# EAGLE board Trefferzonenmodul (EAGLE 7.2.0)
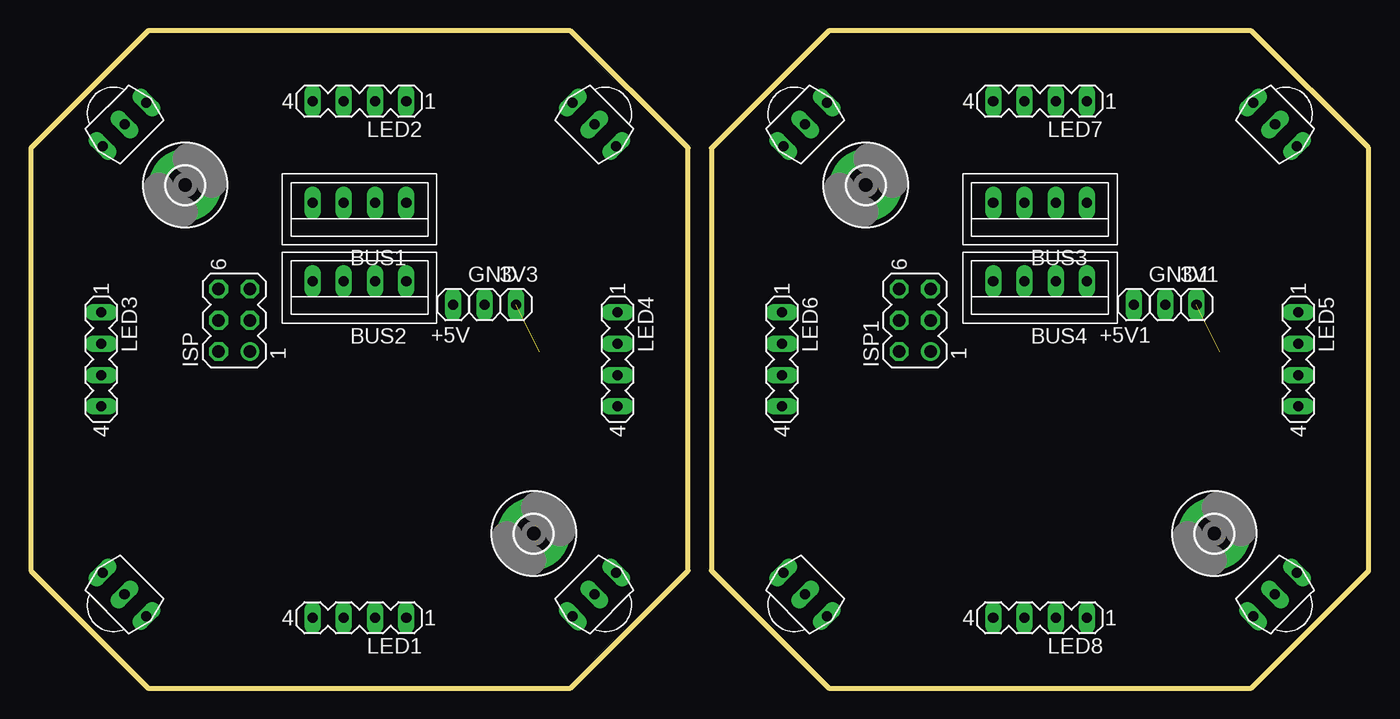
[diagram p0: board, top side]
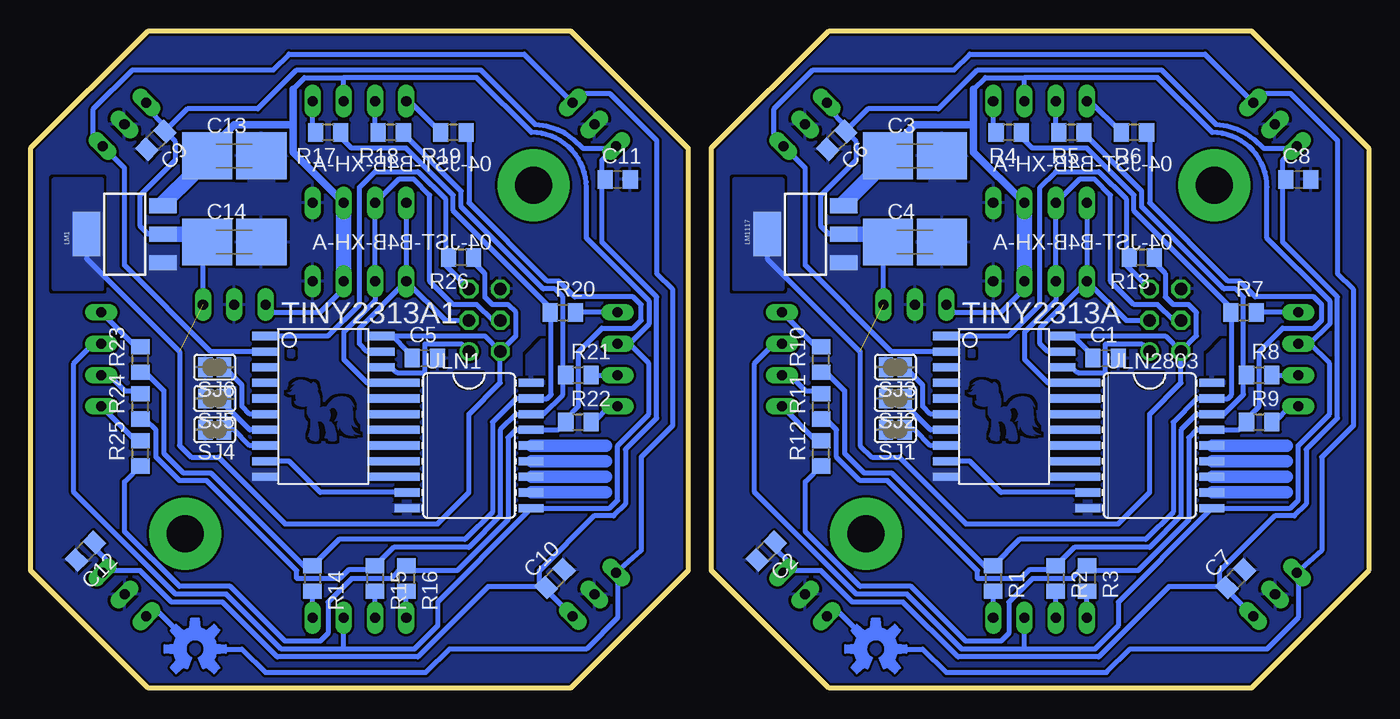
[diagram p1: board, bottom side, seen from below]

Size 108.58 x 53.33 mm. Coordinates in mm from the lower left corner, seen from the top.
Outline: 0,9.53 9.53,0 43.8,0 53.33,9.51 53.34,9.53 53.34,43.81 53.33,43.83 43.8,53.33 9.53,53.33 0,43.81 0,9.53
Outline: 55.24,9.53 64.77,0 99.05,0 108.57,9.51 108.58,9.53 108.58,43.81 108.57,43.83 99.05,53.33 64.77,53.33 55.24,43.81 55.24,9.53
Copper layers (1*16): Top 0.035mm / dielectric 1.5mm / Bottom 0.035mm
Design rules "cnc *": minimum track width 10mil, minimum drill 0.1mm, track to track 8mil, track to pad 8mil, pad to pad 8mil, via to via 8mil, smd to smd 8mil, copper to edge 8mil, drill to drill 8mil, minimum pad ring 10mil, minimum via ring 8mil, stop-mask expansion 4mil, vias tented up to drill 0mil, thermal gap 10mil
Net classes: 0 default: width 0.016 mm

## Footprints (pad centres in the part's own frame; a part is rotated, then mirrored left to right if it is on the bottom)
1X01 = drill 0.813 long: 1 0,0
B4B-XH = drill 0.813 long: P$1 -3.81,0; P$2 -1.27,0; P$3 1.27,0; P$4 3.81,0
C0805 = smd 1.224 x 1.5: 1 -1.026,0; 2 1.026,0
C1808 = smd 4.064 x 3.81: 1 -2.204,0; 2 2.204,0
3,0-PAD = drill 3 pad 5.842: B3,0 0,0
MA03-2 = drill 1.016: 1 -2.54,-1.27 | drill 1.016 octagon: 2 -2.54,1.27; 3 0,-1.27; 4 0,1.27; 5 2.54,-1.27; 6 2.54,1.27
MA04-1 = drill 0.813 long: 1 -3.81,0; 2 -1.27,0; 3 1.27,0; 4 3.81,0
SOT223 = smd 1.219 x 2.235: 1 -2.311,-3.099; 2 0,-3.099; 3 2.311,-3.099 | smd 3.6 x 2.2: 4 0,3.099
R0805 = smd 1.224 x 1.5: 1 -1.026,0; 2 1.026,0
SJ = smd 1.168 x 1.6: 1 -0.762,0; 2 0.762,0
SO20L = smd 0.66 x 2.032: 1 -5.08,-5.131; 2 -3.81,-5.131; 3 -2.54,-5.131; 4 -1.27,-5.131; 5 0,-5.131; 6 1.27,-5.131; 7 2.54,-5.131; 8 3.81,-5.131; 9 5.08,-5.131; 10 6.35,-5.131; 11 6.35,4.394; 12 5.08,4.394; 13 3.81,4.394; 14 2.54,4.394; 15 1.27,4.394; 16 0,4.394; 17 -1.27,4.394; 18 -2.54,4.394; 19 -3.81,4.394; 20 -5.08,4.394
TSOP18XX = drill 0.813 long: GND -0.001,-0.027; OUT -2.501,-0.027; VCC 2.499,-0.027
SO18W = smd 0.66 x 2.032: 1 -5.08,-5.029; 2 -3.81,-5.029; 3 -2.54,-5.029; 4 -1.27,-5.029; 5 0,-5.029; 6 1.27,-5.029; 7 2.54,-5.029; 8 3.81,-5.029; 9 5.08,-5.029; 10 5.08,5.029; 11 3.81,5.029; 12 2.54,5.029; 13 1.27,5.029; 14 0,5.029; 15 -1.27,5.029; 16 -2.54,5.029; 17 -3.81,5.029; 18 -5.08,5.029

## Placement (x,y rotation side)
3V1  [1X01]  94.61,31.11 0 top
3V3  [1X01]  39.37,31.11 0 top
+5V  [1X01]  34.29,31.11 180 top
+5V1  [1X01]  89.53,31.11 180 top
BUS1  04-JST-B4B-XH-A  [B4B-XH]  26.67,39.37 180 top
BUS2  04-JST-B4B-XH-A  [B4B-XH]  26.67,33.02 180 top
BUS3  04-JST-B4B-XH-A  [B4B-XH]  81.92,39.37 180 top
BUS4  04-JST-B4B-XH-A  [B4B-XH]  81.92,33.02 180 top
C1  100n  [C0805]  21.36,26.77 0 bottom
C2  100n  [C0805]  48.9,11.11 225 bottom
C3  [C1808]  36.83,43.18 0 bottom
C4  [C1808]  36.83,36.2 0 bottom
C5  100n  [C0805]  76.6,26.77 0 bottom
C6  100n  [C0805]  43.18,44.45 225 bottom
C7  100n  [C0805]  10.79,8.89 45 bottom
C8  100n  [C0805]  5.71,41.27 0 bottom
C9  100n  [C0805]  98.42,44.45 225 bottom
C10  100n  [C0805]  66.04,8.89 45 bottom
C11  100n  [C0805]  60.96,41.27 0 bottom
C12  100n  [C0805]  104.14,11.11 225 bottom
C13  [C1808]  92.08,43.18 0 bottom
C14  [C1808]  92.08,36.2 0 bottom
GND  [1X01]  36.83,31.11 0 top
GND1  [1X01]  92.08,31.11 0 top
H1  MOUNT-PAD-ROUND3.0  [3,0-PAD]  12.53,40.81 0 top
H2  MOUNT-PAD-ROUND3.0  [3,0-PAD]  40.81,12.53 0 top
H3  MOUNT-PAD-ROUND3.0  [3,0-PAD]  67.78,40.81 0 top
H4  MOUNT-PAD-ROUND3.0  [3,0-PAD]  96.06,12.53 0 top
ISP  [MA03-2]  16.51,29.84 90 top
ISP1  [MA03-2]  71.75,29.84 90 top
LED1  [MA04-1]  26.67,5.71 180 top
LED2  [MA04-1]  26.67,47.62 180 top
LED3  [MA04-1]  5.71,26.67 270 top
LED4  [MA04-1]  47.62,26.67 270 top
LED5  [MA04-1]  102.87,26.67 270 top
LED6  [MA04-1]  60.96,26.67 270 top
LED7  [MA04-1]  81.92,47.62 180 top
LED8  [MA04-1]  81.92,5.71 180 top
LM1  V_REG_MIC2920  [SOT223]  100.97,36.83 90 bottom
LM1117  V_REG_MIC2920  [SOT223]  45.72,36.83 90 bottom
LOGO1  OSHW-LOGOM  [OSHW-LOGO-M]  95.25,3.17 0 top
LOGO2  OSHW-LOGOM  [OSHW-LOGO-M]  40.01,3.17 0 top
R1  100  [R0805]  30.48,8.89 270 bottom
R2  100  [R0805]  25.4,8.89 270 bottom
R3  100  [R0805]  22.86,8.89 270 bottom
R4  100  [R0805]  29.21,45.09 180 bottom
R5  100  [R0805]  24.13,45.09 180 bottom
R6  100  [R0805]  19.05,45.09 180 bottom
R7  100  [R0805]  10.16,30.48 0 bottom
R8  100  [R0805]  8.89,25.4 0 bottom
R9  100  [R0805]  8.89,21.59 0 bottom
R10  100  [R0805]  44.45,26.67 90 bottom
R11  100  [R0805]  44.45,22.86 90 bottom
R12  100  [R0805]  44.45,19.05 90 bottom
R13  10k  [R0805]  18.41,34.92 180 bottom
R14  100  [R0805]  85.72,8.89 270 bottom
R15  100  [R0805]  80.64,8.89 270 bottom
R16  100  [R0805]  78.11,8.89 270 bottom
R17  100  [R0805]  84.45,45.09 180 bottom
R18  100  [R0805]  79.38,45.09 180 bottom
R19  100  [R0805]  74.3,45.09 180 bottom
R20  100  [R0805]  65.41,30.48 0 bottom
R21  100  [R0805]  64.14,25.4 0 bottom
R22  100  [R0805]  64.14,21.59 0 bottom
R23  100  [R0805]  99.69,26.67 90 bottom
R24  100  [R0805]  99.69,22.86 90 bottom
R25  100  [R0805]  99.69,19.05 90 bottom
R26  10k  [R0805]  73.66,34.92 180 bottom
SJ1  [SJ]  38.42,20.95 180 bottom
SJ2  [SJ]  38.42,23.5 180 bottom
SJ3  [SJ]  38.42,26.04 180 bottom
SJ4  [SJ]  93.66,20.95 180 bottom
SJ5  [SJ]  93.66,23.5 180 bottom
SJ6  [SJ]  93.66,26.04 180 bottom
TINY2313A  AT90S2313S  [SO20L]  29.21,23.5 270 bottom
TINY2313A1  AT90S2313S  [SO20L]  84.45,23.5 270 bottom
U$1  TSOP1838  [TSOP18XX]  45.72,45.72 135 top
U$2  TSOP1838  [TSOP18XX]  7.62,45.72 225 top
U$3  TSOP1838  [TSOP18XX]  7.62,7.62 315 top
U$4  TSOP1838  [TSOP18XX]  45.72,7.62 45 top
U$5  TSOP1838  [TSOP18XX]  100.97,45.72 135 top
U$6  TSOP1838  [TSOP18XX]  62.87,45.72 225 top
U$7  TSOP1838  [TSOP18XX]  62.87,7.62 315 top
U$8  TSOP1838  [TSOP18XX]  100.97,7.62 45 top
ULN1  [SO18W]  73.03,19.68 270 bottom
ULN2803  [SO18W]  17.78,19.68 270 bottom

## Library data of the parts
3V1 3V3 +5V +5V1 BUS1-BUS4 C1-C14 GND GND1 LM1 LM1117 LOGO1 LOGO2 R1-R26 ULN1 ULN2803 = wz
H1-H4 = holes
ISP ISP1 = con-lstb; OC_FARNELL: unknown; OC_NEWARK: unknown
LED1-LED8 TINY2313A TINY2313A1 = wz; OC_FARNELL: unknown; OC_NEWARK: unknown
SJ1-SJ6 = jumper
U$1-U$8 = tsop

## Nets
+3V1: 3V1.1 C5.1 C9.1 C10.1 C11.1 C12.1 C14.1 ISP1.2 LM1.2 LM1.4 R26.1 TINY2313A1.20 U$5.VCC U$6.VCC U$7.VCC U$8.VCC
+3V3: 3V3.1 C1.1 C2.1 C4.1 C6.1 C7.1 C8.1 ISP.2 LM1117.2 LM1117.4 R13.1 TINY2313A.20 U$1.VCC U$2.VCC U$3.VCC U$4.VCC
+5V: +5V.1 BUS1.P$2 BUS2.P$2 C3.1 LED1.2 LED2.2 LED3.2 LED4.2 LM1117.3 ULN2803.10
+5V1: +5V1.1 BUS3.P$2 BUS4.P$2 C13.1 LED5.2 LED6.2 LED7.2 LED8.2 LM1.3 ULN1.10
FREI1: ULN2803.18
FREI2: ULN1.14
FREI3: ULN1.12
FREI4: ULN1.13
FREI5: ULN2803.14
FREI6: ULN2803.13
FREI7: ULN2803.12
FREI8: ULN1.18
GND: BUS1.P$1 BUS2.P$1 C1.2 C2.2 C3.2 C4.2 C6.2 C7.2 C8.2 GND.1 ISP.6 LM1117.1 SJ1.2 SJ2.2 SJ3.2 TINY2313A.10 U$1.GND U$2.GND U$3.GND U$4.GND ULN2803.9
GND1: BUS3.P$1 BUS4.P$1 C5.2 C9.2 C10.2 C11.2 C12.2 C13.2 C14.2 GND1.1 ISP1.6 LM1.1 SJ4.2 SJ5.2 SJ6.2 TINY2313A1.10 U$5.GND U$6.GND U$7.GND U$8.GND ULN1.9
HAPTIK: ULN2803.11
HAPTIK1: ULN1.11
LED_B: R3.1 R6.1 R9.1 R12.1 ULN2803.15
LED_B1: R16.1 R19.1 R22.1 R25.1 ULN1.15
LED_G: R2.1 R5.1 R8.1 R11.1 ULN2803.16
LED_G1: R15.1 R18.1 R21.1 R24.1 ULN1.16
LED_R: R1.1 R4.1 R7.1 R10.1 ULN2803.17
LED_R1: R14.1 R17.1 R20.1 R23.1 ULN1.17
N$1: ISP.1 TINY2313A.18
N$2: SJ1.1 TINY2313A.8
N$3: TINY2313A.16 ULN2803.2
N$4: TINY2313A.15 ULN2803.3
N$5: LED4.1 R10.2
N$6: LED4.3 R11.2
N$7: TINY2313A.14 ULN2803.4
N$8: TINY2313A.13 ULN2803.5
N$9: TINY2313A.12 ULN2803.6
N$10: TINY2313A.11 ULN2803.7
N$11: TINY2313A.9 ULN2803.8
N$12: LED4.4 R12.2
N$13: LED3.1 R7.2
N$14: LED3.3 R8.2
N$15: LED3.4 R9.2
N$16: LED2.1 R4.2
N$17: LED2.3 R5.2
N$18: SJ2.1 TINY2313A.7
N$19: SJ3.1 TINY2313A.6
N$22: LED2.4 R6.2
N$23: ISP.5 R13.2 TINY2313A.1
N$24: LED1.1 R1.2
N$25: LED1.3 R2.2
N$26: LED1.4 R3.2
N$33: ISP1.1 TINY2313A1.18
N$34: TINY2313A1.16 ULN1.2
N$35: TINY2313A1.15 ULN1.3
N$36: TINY2313A1.14 ULN1.4
N$37: TINY2313A1.13 ULN1.5
N$38: TINY2313A1.12 ULN1.6
N$39: TINY2313A1.11 ULN1.7
N$40: TINY2313A1.9 ULN1.8
N$41: SJ4.1 TINY2313A1.8
N$42: SJ5.1 TINY2313A1.7
N$43: SJ6.1 TINY2313A1.6
N$44: ISP1.5 R26.2 TINY2313A1.1
N$45: LED5.1 R23.2
N$46: LED5.3 R24.2
N$47: LED5.4 R25.2
N$48: LED6.1 R20.2
N$49: LED6.3 R21.2
N$50: LED6.4 R22.2
N$51: LED7.1 R17.2
N$52: LED7.3 R18.2
N$53: LED7.4 R19.2
N$54: LED8.1 R14.2
N$55: LED8.3 R15.2
N$56: LED8.4 R16.2
RX: TINY2313A.2 U$1.OUT U$2.OUT U$3.OUT U$4.OUT
RX1: TINY2313A1.2 U$5.OUT U$6.OUT U$7.OUT U$8.OUT
SCL: BUS1.P$4 BUS2.P$4 ISP.3 TINY2313A.19
SCL1: BUS3.P$4 BUS4.P$4 ISP1.3 TINY2313A1.19
SDA: BUS1.P$3 BUS2.P$3 ISP.4 TINY2313A.17 ULN2803.1
SDA1: BUS3.P$3 BUS4.P$3 ISP1.4 TINY2313A1.17 ULN1.1

## Tracks (layer width: path | path; a pad name or v marks a point on that pad's centre or on a via)
+3V1  (1 unrouted)
  Bottom 0.406: LM1.2 99.06,36.83 99.69,37.47 99.69,40.01 96.84,42.86 96.84,44.31 C9.1 | TINY2313A1.20 79.24,28.57 | 79.24,28.57 71.75,28.57 ISP1.2 | LM1.4 104.06,34.85 96.52,27.3 96.52,19.68 95.57,18.73 93.34,18.73 87.95,13.34 75.56,13.34 73.03,15.88 73.03,22.23 70.48,24.77 ISP1.2 | C14.1 93.81,35.09 94.61,34.92 3V1.1 | 67.31,8.26 71.44,8.26 77.15,2.54 88.58,2.54 93.03,6.99 97.16,6.99 99.69,9.53 102.59,9.53 U$8.VCC 102.23,9.88 102.23,10.16 103.41,11.34 C12.1 | 67.31,8.26 66.86,8.26 C10.1 | C10.1 67.22,8.16 67.31,8.26 | 67.31,8.26 67.31,9.53 62.87,13.97 61.28,13.97 60.33,14.92 60.33,19.37 57.78,21.91 57.78,31.75 62.23,36.2 62.23,41.46 | C10.1 66.77,7.99 U$7.VCC | C9.1 97.7,45.63 99.06,46.99 99.06,47.35 U$5.VCC | C9.1 95.89,46.99 90.17,46.99 87,50.16 72.07,50.16 67.63,45.72 66.75,45.6 65.84,45.3 65.25,45 64.55,44.5 63.82,43.81 61.24,43.81 U$6.VCC 62.23,42.82 62.23,41.46 | ISP1.2 69.22,28.57 69.22,30.48 69.85,31.11 71.12,31.11 71.75,31.75 71.75,33.66 72.39,34.29 72.39,34.68 R26.1 | C5.1 77.94,27.28 79.24,28.57 | 62.23,41.46 C11.1
  Bottom 1.27: LM1.2 95.25,36.83 94.28,35.86 C14.1
  pour Bottom (no thermals): 102.87,41.27 102.87,32.38 106.68,32.38 106.68,41.27
+3V3  (1 unrouted)
  Bottom 0.406: LM1117.2 43.81,36.83 44.45,37.47 44.45,40.01 41.59,42.86 41.59,44.31 C6.1 | TINY2313A.20 24,28.57 | 24,28.57 16.51,28.57 ISP.2 | LM1117.4 48.82,34.85 41.27,27.3 41.27,19.68 40.32,18.73 38.1,18.73 32.7,13.34 20.32,13.34 17.78,15.88 17.78,22.23 15.24,24.77 ISP.2 | C4.1 38.57,35.09 39.37,34.92 3V3.1 | 12.06,8.26 16.19,8.26 21.91,2.54 33.34,2.54 37.78,6.99 41.91,6.99 44.45,9.53 47.35,9.53 U$4.VCC 46.99,9.88 46.99,10.16 48.17,11.34 C2.1 | 12.06,8.26 11.61,8.26 C7.1 | C7.1 11.97,8.16 12.06,8.26 | 12.06,8.26 12.06,9.53 7.62,13.97 6.03,13.97 5.08,14.92 5.08,19.37 2.54,21.91 2.54,31.75 6.99,36.2 6.99,41.46 | C7.1 11.52,7.99 U$3.VCC | C6.1 42.45,45.63 43.81,46.99 43.81,47.35 U$1.VCC | C6.1 40.64,46.99 34.92,46.99 31.75,50.16 16.83,50.16 12.38,45.72 11.5,45.6 10.6,45.3 10,45 9.3,44.5 8.57,43.81 5.99,43.81 U$2.VCC 6.99,42.82 6.99,41.46 | ISP.2 13.97,28.57 13.97,30.48 14.61,31.11 15.88,31.11 16.51,31.75 16.51,33.66 17.14,34.29 17.14,34.68 R13.1 | C1.1 22.7,27.28 24,28.57 | 6.99,41.46 C8.1
  Bottom 1.27: LM1117.2 40.01,36.83 39.03,35.86 C4.1
  pour Bottom (no thermals): 47.62,41.27 47.62,32.38 51.44,32.38 51.44,41.27
+5V
  Bottom 0.406: 27.94,3.17 22.23,3.17 20.32,5.08 20.32,6.99 13.34,13.97 ULN2803.10 6.35,14.61 5.71,15.24 5.71,19.68 3.17,22.23 3.17,26.35 4.76,27.94 | 27.94,3.17 LED1.2 | LED2.2 27.94,49.53 | 27.94,49.53 17.14,49.53 12.7,45.09 arc90 8.26,40.64 8.26,36.51 3.17,31.43 3.17,29.53 4.76,27.94 | C3.1 40.13,41.78 37.47,42.55 38.1,44.45 | 32.07,48.58 31.11,49.53 27.94,49.53 | LED4.2 48.26,27.94 49.85,26.35 49.85,15.88 41.59,7.62 37.47,7.62 33.02,3.17 27.94,3.17 | 4.76,27.94 LED3.2 | LM1117.3 42.62,39.29 | +5V.1 33.66,30.48 29.84,30.48 27.94,32.38 BUS2.P$2
  Bottom 0.61: 38.1,44.45 36.83,45.72 32.07,45.72 | 32.07,45.72 32.07,48.58 | 32.07,45.72 32.07,43.5 BUS1.P$2
  Bottom 1.27: 42.62,39.29 40.13,41.78 | BUS2.P$2 BUS1.P$2
+5V1
  Bottom 0.406: 83.19,3.17 77.47,3.17 75.56,5.08 75.56,6.99 68.58,13.97 ULN1.10 61.59,14.61 60.96,15.24 60.96,19.68 58.42,22.23 58.42,26.35 60.01,27.94 | 83.19,3.17 LED8.2 | LED7.2 83.19,49.53 | 83.19,49.53 72.39,49.53 67.94,45.09 arc90 63.5,40.64 63.5,36.51 58.42,31.43 58.42,29.53 60.01,27.94 | C13.1 95.38,41.78 92.71,42.55 93.34,44.45 | 87.31,48.58 86.36,49.53 83.19,49.53 | LED5.2 103.5,27.94 105.09,26.35 105.09,15.88 96.84,7.62 92.71,7.62 88.27,3.17 83.19,3.17 | 60.01,27.94 LED6.2 | LM1.3 97.87,39.29 | +5V1.1 88.9,30.48 85.09,30.48 83.19,32.38 BUS4.P$2
  Bottom 0.61: 93.34,44.45 92.08,45.72 87.31,45.72 | 87.31,45.72 87.31,48.58 | 87.31,45.72 87.31,43.5 BUS3.P$2
  Bottom 1.27: 97.87,39.29 95.38,41.78 | BUS4.P$2 BUS3.P$2
FREI1
  pour Bottom (isolate 0.264): 11.75,24.77 11.75,28.26 13.02,26.99 13.02,24.77
FREI8
  pour Bottom (isolate 0.264): 66.99,24.77 66.99,28.26 68.26,26.99 68.26,24.77
GND
  pour Bottom (rank 6): 0,43.81 9.53,53.34 43.81,53.34 53.34,43.81 53.34,9.53 43.81,0 9.53,0 0,9.53
  pour Bottom (no thermals): 40.64,36.2 45.09,36.2 45.09,32.38 40.64,32.38
  pour Bottom: 20.95,15.24 24.77,15.24 24.77,13.97 20.95,13.97
  pour Bottom (no thermals): 33.02,18.41 36.2,18.41 36.2,16.51 33.02,16.51
  pour Bottom (no thermals): 33.66,41.91 35.56,41.91 35.56,40.64 33.66,40.64
GND1
  pour Bottom (rank 6): 55.24,43.81 64.77,53.34 99.06,53.34 108.58,43.81 108.58,9.53 99.06,0 64.77,0 55.24,9.53
  pour Bottom (no thermals): 95.89,36.2 100.33,36.2 100.33,32.38 95.89,32.38
  pour Bottom: 76.2,15.24 80.01,15.24 80.01,13.97 76.2,13.97
  pour Bottom (no thermals): 88.27,18.41 91.44,18.41 91.44,16.51 88.27,16.51
  pour Bottom (no thermals): 88.9,41.91 90.81,41.91 90.81,40.64 88.9,40.64
LED_B
  Bottom 0.406: R12.1 45.72,16.75 45.72,12.7 41.27,8.26 37.15,8.26 32.7,3.81 29.84,3.81 29.21,4.45 29.21,6.99 27.3,8.89 24.13,8.89 23.1,9.92 R3.1 22.62,9.53 18.73,9.53 14.61,13.65 14.61,20.32 13.97,20.95 ULN2803.15 10.55,20.95 R9.1 9.92,21.83 8.89,22.86 8.89,27.3 6.99,29.21 4.45,29.21 3.81,29.84 3.81,31.11 4.45,31.75 9.21,31.75 10.48,33.02 11.43,33.02 17.78,39.37 17.78,44.84 R6.1
LED_B1
  Bottom 0.406: R25.1 100.97,16.75 100.97,12.7 96.52,8.26 92.39,8.26 87.95,3.81 85.09,3.81 84.45,4.45 84.45,6.99 82.55,8.89 79.38,8.89 78.35,9.92 R16.1 77.86,9.53 73.98,9.53 69.85,13.65 69.85,20.32 69.22,20.95 ULN1.15 65.8,20.95 R22.1 65.16,21.83 64.14,22.86 64.14,27.3 62.23,29.21 59.69,29.21 59.05,29.84 59.05,31.11 59.69,31.75 64.45,31.75 65.72,33.02 66.67,33.02 73.03,39.37 73.03,44.84 R19.1
LED_G
  Bottom 0.406: 10.16,24.77 10.16,23.81 11.75,22.23 ULN2803.16 13.97,22.23 15.24,20.95 15.24,13.97 17.78,11.43 23.89,11.43 R2.1 25.72,9.84 26.11,9.6 27.55,9.6 28.26,8.89 31.75,8.89 31.75,9.53 39.05,16.83 41.27,16.83 43.18,18.73 43.18,20.95 44.06,21.83 R11.1 | 10.16,24.77 10.16,31.75 10.79,32.38 11.75,32.38 18.41,39.05 18.41,40.32 22.54,44.45 23.1,44.69 R5.1 | R8.1 10.16,24.77
LED_G1
  Bottom 0.406: 65.41,24.77 65.41,23.81 66.99,22.23 ULN1.16 69.22,22.23 70.48,20.95 70.48,13.97 73.03,11.43 79.13,11.43 R15.1 80.96,9.84 81.35,9.6 82.79,9.6 83.5,8.89 87,8.89 87,9.53 94.3,16.83 96.52,16.83 98.42,18.73 98.42,20.95 99.3,21.83 R24.1 | 65.41,24.77 65.41,31.75 66.04,32.38 66.99,32.38 73.66,39.05 73.66,40.32 77.79,44.45 78.35,44.69 R18.1 | R21.1 65.41,24.77
LED_R
  Bottom 0.406: 11.19,30.72 11.19,30.87 19.05,38.73 19.05,40.01 22.86,43.81 27.3,43.81 28.18,44.69 R4.1 27.94,45.09 | 30.72,9.53 30.8,9.53 38.73,17.46 40.96,17.46 42.55,19.05 42.55,24.13 44.06,25.64 R10.1 | 30.48,9.53 30.72,9.53 | 30.72,9.53 R1.1 28.33,12.06 18.1,12.06 15.88,14.29 15.88,21.59 13.97,23.5 ULN2803.17 11.43,23.5 11.11,23.81 11.11,30.16 11.19,30.72 | R7.1 11.19,30.72
LED_R1
  Bottom 0.406: 66.43,30.72 66.43,30.87 74.3,38.73 74.3,40.01 78.11,43.81 82.55,43.81 83.43,44.69 R17.1 83.19,45.09 | 85.97,9.53 86.04,9.53 93.98,17.46 96.2,17.46 97.79,19.05 97.79,24.13 99.3,25.64 R23.1 | 85.72,9.53 85.97,9.53 | 85.97,9.53 R14.1 83.58,12.06 73.34,12.06 71.12,14.29 71.12,21.59 69.22,23.5 ULN1.17 66.67,23.5 66.36,23.81 66.36,30.16 66.43,30.72 | R20.1 66.43,30.72
N$1
  Bottom 0.406: TINY2313A.18 24.13,26.04 23.59,25.6 21.36,25.6 21.36,27.94 18.41,27.94 ISP.1
N$2
  Bottom 0.406: TINY2313A.8 35.56,19.68 36.83,20.95 SJ1.1
N$3
  Bottom 0.406: ULN2803.2 TINY2313A.16
N$4
  Bottom 0.406: ULN2803.3 TINY2313A.15
N$5
  Bottom 0.406: R10.2 44.84,27.7 LED4.1
N$6
  Bottom 0.406: LED4.3 46.99,25.4 45.72,24.13 44.69,24.13 R11.2
N$7
  Bottom 0.406: ULN2803.4 TINY2313A.14
N$8
  Bottom 0.406: ULN2803.5 TINY2313A.13
N$9
  Bottom 0.406: ULN2803.6 TINY2313A.12
N$10
  Bottom 0.406: ULN2803.7 TINY2313A.11
N$11
  Bottom 0.406: ULN2803.8 29.84,15.88 32.38,18.41 TINY2313A.9
N$12
  Bottom 0.406: R12.2 44.84,20.08 LED4.4
N$13
  Bottom 0.406: LED3.1 R7.2
N$14
  Bottom 0.406: R8.2 LED3.3
N$15
  Bottom 0.406: R9.2 7.62,21.59 6.35,22.86 LED3.4
N$16
  Bottom 0.406: R4.2 30.24,45.48 30.48,45.72 LED2.1
N$17
  Bottom 0.406: R5.2 25.16,44.84 25.4,45.72 LED2.3
N$18
  Bottom 0.406: TINY2313A.7 35.56,20.95 37.47,22.86 37.47,23.05 SJ2.1 37.34,22.73
N$19
  Bottom 0.406: TINY2313A.6 35.56,22.23 36.2,22.86 36.2,24.57 SJ3.1
N$21
  Bottom 1.016: 12.7,19.68 6.67,19.68
N$22
  Bottom 0.406: R6.2 22.62,47.62 LED2.4
N$23
  Bottom 0.406: TINY2313A.1 29.21,28.57 26.67,31.11 26.67,40.64 25.4,41.91 21.91,41.91 19.68,39.69 19.68,34.92 | 19.68,34.92 19.68,34.29 ISP.5 | R13.2 19.68,34.92
N$24
  Bottom 0.406: LED1.1 R1.2
N$25
  Bottom 0.406: LED1.3 R2.2
N$26
  Bottom 0.406: LED1.4 R3.2
N$27
  Bottom 1.016: 12.7,18.41 6.67,18.41
N$28
  Bottom 1.016: 12.7,17.14 6.67,17.14
N$29
  Bottom 1.016: 12.7,15.88 6.67,15.88
N$30
  pour Bottom: 225 corners
N$31
  pour Bottom: 32.07,27.3 32.38,27.3 32.38,26.99 32.07,26.99
N$32
  pour Bottom: 16.83,25.4 18.73,25.4 arc-90 17.78,24.55 arc-90
N$33
  Bottom 0.406: TINY2313A1.18 79.38,26.04 78.84,25.6 76.6,25.6 76.6,27.94 73.66,27.94 ISP1.1
N$34
  Bottom 0.406: ULN1.2 TINY2313A1.16
N$35
  Bottom 0.406: ULN1.3 TINY2313A1.15
N$36
  Bottom 0.406: ULN1.4 TINY2313A1.14
N$37
  Bottom 0.406: ULN1.5 TINY2313A1.13
N$38
  Bottom 0.406: ULN1.6 TINY2313A1.12
N$39
  Bottom 0.406: ULN1.7 TINY2313A1.11
N$40
  Bottom 0.406: ULN1.8 85.09,15.88 87.63,18.41 TINY2313A1.9
N$41
  Bottom 0.406: TINY2313A1.8 90.81,19.68 92.08,20.95 SJ4.1
N$42
  Bottom 0.406: TINY2313A1.7 90.81,20.95 92.71,22.86 92.71,23.05 SJ5.1 92.58,22.73
N$43
  Bottom 0.406: TINY2313A1.6 90.81,22.23 91.44,22.86 91.44,24.57 SJ6.1
N$44
  Bottom 0.406: TINY2313A1.1 84.45,28.57 81.92,31.11 81.92,40.64 80.64,41.91 77.15,41.91 74.93,39.69 74.93,34.92 | 74.93,34.92 74.93,34.29 ISP1.5 | R26.2 74.93,34.92
N$45
  Bottom 0.406: R23.2 100.09,27.7 LED5.1
N$46
  Bottom 0.406: LED5.3 102.23,25.4 100.97,24.13 99.94,24.13 R24.2
N$47
  Bottom 0.406: R25.2 100.09,20.08 LED5.4
N$48
  Bottom 0.406: LED6.1 R20.2
N$49
  Bottom 0.406: R21.2 LED6.3
N$50
  Bottom 0.406: R22.2 62.87,21.59 61.59,22.86 LED6.4
N$51
  Bottom 0.406: R17.2 85.48,45.48 85.72,45.72 LED7.1
N$52
  Bottom 0.406: R18.2 80.4,44.84 80.64,45.72 LED7.3
N$53
  Bottom 0.406: R19.2 77.86,47.62 LED7.4
N$54
  Bottom 0.406: LED8.1 R14.2
N$55
  Bottom 0.406: LED8.3 R15.2
N$56
  Bottom 0.406: LED8.4 R16.2
N$57
  Bottom 1.016: 67.94,19.68 61.91,19.68
N$58
  Bottom 1.016: 67.94,18.41 61.91,18.41
N$59
  Bottom 1.016: 67.94,17.14 61.91,17.14
N$60
  Bottom 1.016: 67.94,15.88 61.91,15.88
N$61
  pour Bottom: 225 corners
N$62
  pour Bottom: 87.31,27.3 87.63,27.3 87.63,26.99 87.31,26.99
N$63
  pour Bottom: 72.07,25.4 73.98,25.4 arc-90 73.03,24.55 arc-90
RX
  Bottom 0.406: TINY2313A.2 38.73,27.3 45.72,34.29 45.72,42.18 U$1.OUT 47.51,44.33 48.26,44.45 48.26,46.99 45.09,50.16 33.66,50.16 32.38,51.44 13.3,51.44 U$2.OUT 9.37,47.78 8.89,48.26 6.35,48.26 2.54,44.45 2.54,33.66 1.27,32.38 1.27,21.23 1.31,21.23 3.81,18.73 3.81,11.16 U$3.OUT 5.71,8.62 5.71,5.71 8.26,3.17 19.37,3.17 21.27,1.27 34.29,1.27 36.2,3.17 38.73,3.17 38.73,3.81 39.37,4.45 41.27,4.45 43.18,6.35 43.7,5.83 U$4.OUT
RX1
  Bottom 0.406: TINY2313A1.2 93.98,27.3 100.97,34.29 100.97,42.18 U$5.OUT 102.75,44.33 103.5,44.45 103.5,46.99 100.33,50.16 88.9,50.16 87.63,51.44 68.54,51.44 U$6.OUT 64.61,47.78 64.14,48.26 61.59,48.26 57.78,44.45 57.78,33.66 56.52,32.38 56.52,21.23 56.55,21.23 59.05,18.73 59.05,11.16 U$7.OUT 60.96,8.62 60.96,5.71 63.5,3.17 74.61,3.17 76.52,1.27 89.53,1.27 91.44,3.17 93.98,3.17 93.98,3.81 94.61,4.45 96.52,4.45 98.42,6.35 98.94,5.83 U$8.OUT
SCL
  Bottom 0.406: ISP.3 19.68,29.84 BUS2.P$4 | TINY2313A.19 26.04,27.3 26.67,27.94 26.67,29.21 BUS2.P$4 | BUS1.P$4 BUS2.P$4
SCL1
  Bottom 0.406: ISP1.3 74.93,29.84 BUS4.P$4 | TINY2313A1.19 81.28,27.3 81.92,27.94 81.92,29.21 BUS4.P$4 | BUS3.P$4 BUS4.P$4
SDA
  Bottom 0.406: ULN2803.1 TINY2313A.17 26.04,24.77 27.94,26.67 27.94,28.89 25.4,31.43 BUS2.P$3 BUS1.P$3 23.5,41.27 22.23,41.27 20.95,40.01 20.95,33.02 19.05,31.11 17.14,31.11 15.88,29.84 ISP.4
SDA1
  Bottom 0.406: ULN1.1 TINY2313A1.17 81.28,24.77 83.19,26.67 83.19,28.89 80.64,31.43 BUS4.P$3 BUS3.P$3 78.74,41.27 77.47,41.27 76.2,40.01 76.2,33.02 74.3,31.11 72.39,31.11 71.12,29.84 ISP1.4